# EAGLE board StemsField_V1.0 (EAGLE 8.5.1)
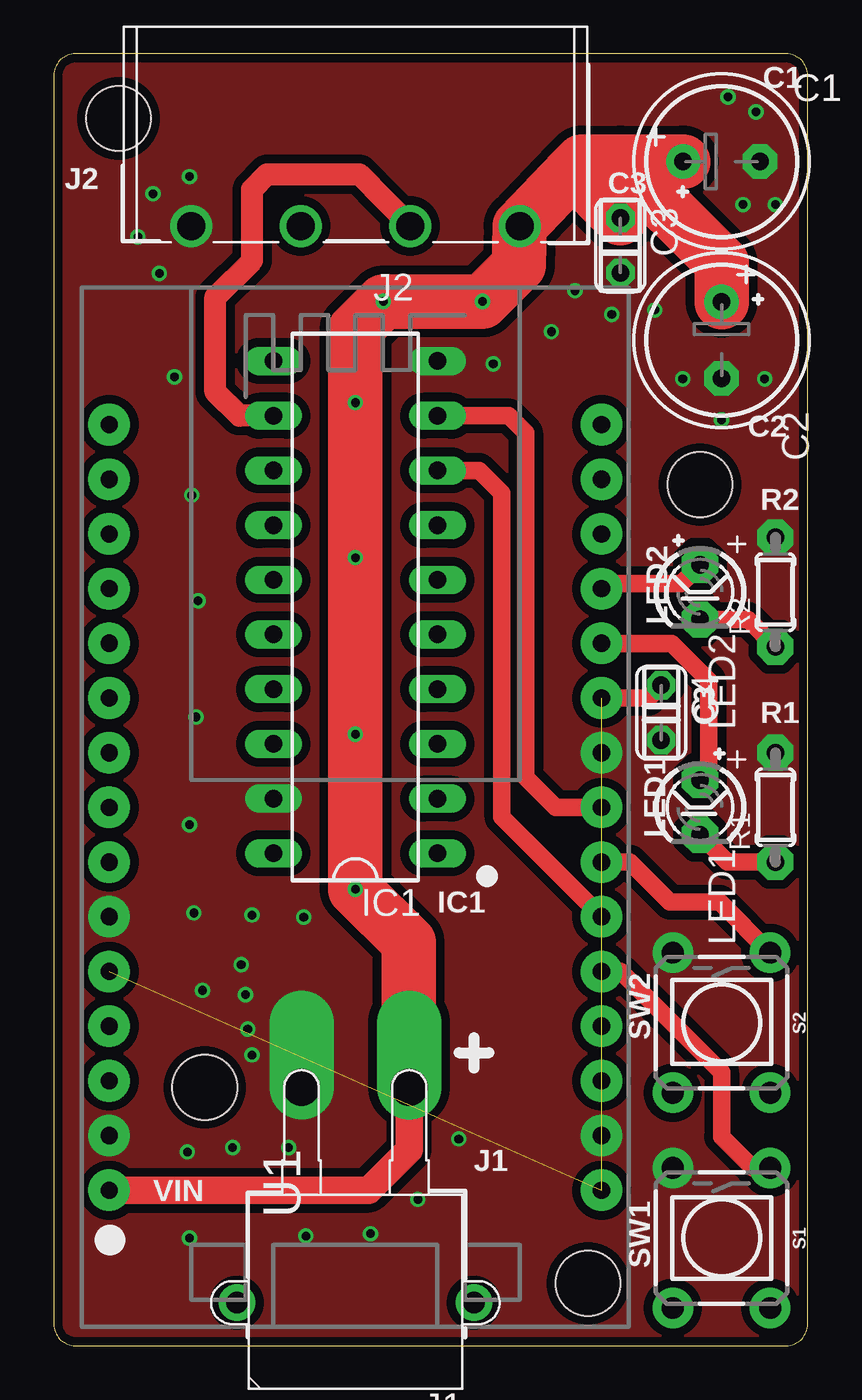
[diagram p0: board, top side]
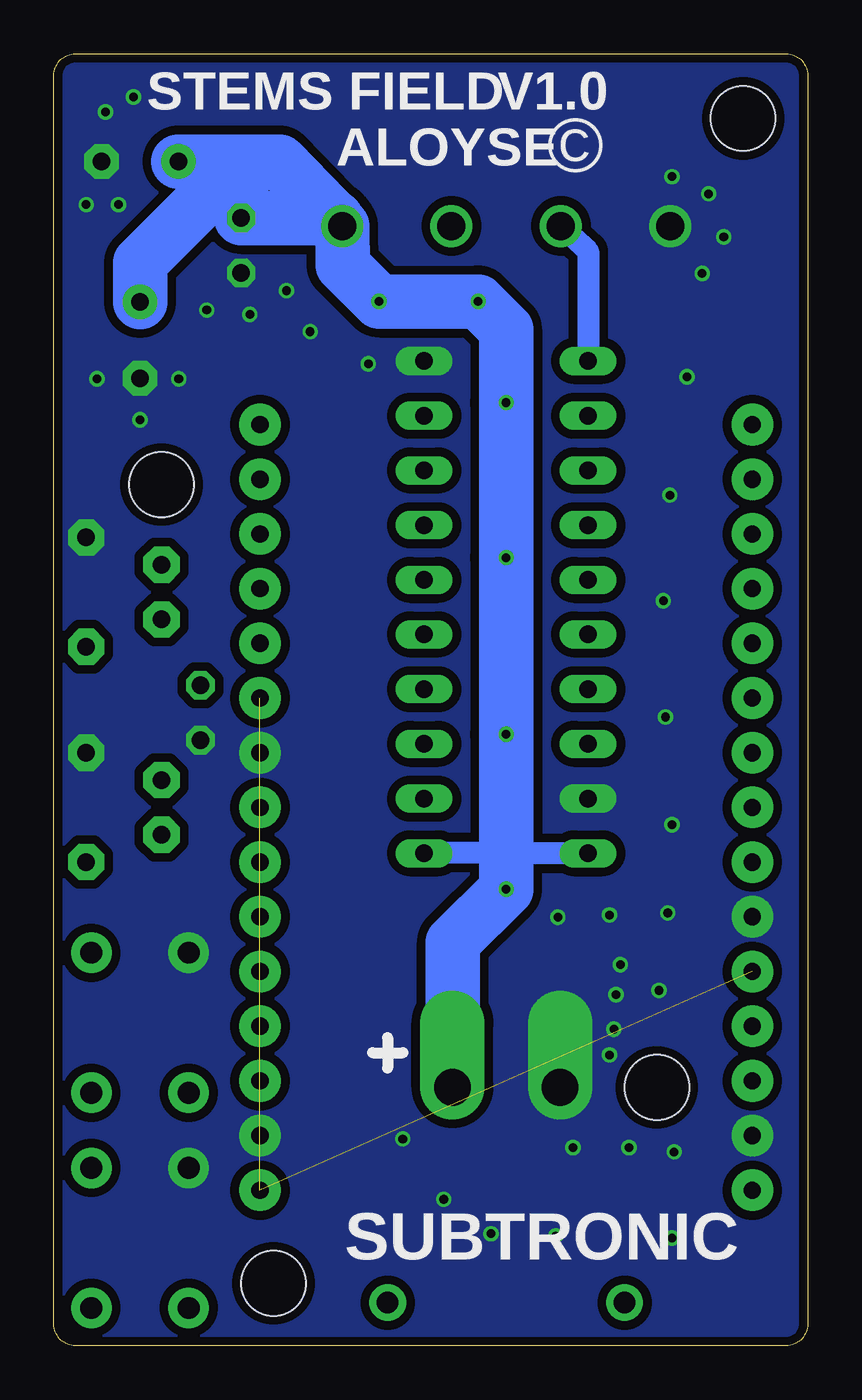
[diagram p1: board, bottom side, seen from below]

Size 35 x 60 mm. Coordinates in mm from the lower left corner, seen from the top.
Outline: 0,59 0,1 arc90 1,0 34,0 arc90 35,1 35,59 arc90 34,60 1,60 arc90 0,59
Copper layers (1*16): Top 0.035mm / dielectric 1.5mm / Bottom 0.035mm
Design rules "SeeedStudio_2layer_DRU_no_angle_20140221": minimum track width 6mil, minimum drill 12mil, track to track 6mil, track to pad 6mil, pad to pad 6mil, via to via 6mil, smd to smd 0mil, copper to edge 10mil, drill to drill 10mil, minimum pad ring 10mil, minimum via ring 6mil, stop-mask expansion 2mil, vias tented up to drill 100mil, thermal gap 10mil
Holes 3 mm at 7,12 24.8,2.9 30,40 3,57

## Footprints (pad centres in the part's own frame; a part is rotated, then mirrored left to right if it is on the bottom)
E3,5-8 = drill 0.813 pad 1.6: + -1.778,0 | drill 0.813 pad 1.6 octagon: - 1.778,0
C025-024X044 = drill 0.813 octagon: 1 -1.27,0; 2 1.27,0
DIL20 = drill 0.813 long: 1 -11.43,-3.81; 2 -8.89,-3.81; 3 -6.35,-3.81; 4 -3.81,-3.81; 5 -1.27,-3.81; 6 1.27,-3.81; 7 3.81,-3.81; 8 6.35,-3.81; 9 8.89,-3.81; 10 11.43,-3.81; 11 11.43,3.81; 12 8.89,3.81; 13 6.35,3.81; 14 3.81,3.81; 15 1.27,3.81; 16 -1.27,3.81; 17 -3.81,3.81; 18 -6.35,3.81; 19 -8.89,3.81; 20 -11.43,3.81
XT30PW-M = drill 1 pad 1.7: NC1 5.5,5; NC2 -5.5,5 | drill 1.7 pad 3 offset: P1 2.5,-5; P2 -2.5,-5
691213500004 = drill 1.3: 1 -7.62,0; 2 -2.54,0; 3 2.54,0; 4 7.62,0
LED3MM = drill 0.813 pad 1.676 octagon: A -1.27,0; K 1.27,0
0204/5 = drill 0.813 pad 1.676 octagon: 1 -2.54,0; 2 2.54,0
TACTILE_SWITCH_PTH_6.0MM = drill 1.016 pad 1.88: 1 -3.251,2.261; 2 3.251,2.261; 3 -3.251,-2.261; 4 3.251,-2.261
ESP12E_DEVKIT = drill 0.8 pad 1.93: 3V3@0 -11.43,-7.62; 3V3@1 11.43,5.08; 3V3@2 11.43,-17.78; AD0 -11.43,17.78; CLK -11.43,-2.54; CMD -11.43,2.54; D0 11.43,17.78; D1 11.43,15.24; D2 11.43,12.7; D3 11.43,10.16; D4 11.43,7.62; D5 11.43,0; D6 11.43,-2.54; D7 11.43,-5.08; D8 11.43,-7.62; EN -11.43,-10.16; GND@0 -11.43,-5.08; GND@1 -11.43,-15.24; GND@2 11.43,2.54; GND@3 11.43,-15.24; RST -11.43,-12.7; RSV@0 -11.43,15.24; RSV@1 -11.43,12.7; RX 11.43,-10.16; SD0 -11.43,0; SD1 -11.43,5.08; SD2 -11.43,7.62; SD3 -11.43,10.16; TX 11.43,-12.7; VIN -11.43,-17.78

## Placement (x,y rotation side)
C1  [E3,5-8]  31,55 0 top
C2  [E3,5-8]  31,46.7 270 top
C3  [C025-024X044]  26.3,51.1 270 top
C4  [C025-024X044]  28.2,29.4 270 top
IC1  74HCT245N  [DIL20]  14,34.3 90 top
J1  XT30PWM  [XT30PW-M]  14,7 180 top
J2  [691213500004]  14,52 180 top
LED1  [LED3MM]  30,25 270 top
LED2  [LED3MM]  30,35 270 top
R1  [0204/5]  33.5,25 90 top
R2  [0204/5]  33.5,35 90 top
S1  MOMENTARY-SWITCH-SPST-PTH-6.0MM  [TACTILE_SWITCH_PTH_6.0MM]  31,5 270 top
S2  MOMENTARY-SWITCH-SPST-PTH-6.0MM  [TACTILE_SWITCH_PTH_6.0MM]  31,15 270 top
U1  ESP12E_DEVKIT  [ESP12E_DEVKIT]  14,25 0 top

## Library data of the parts
C1-C4 = rcl; SPICEPREFIX: C
IC1 = 74xx-eu; SPICEPREFIX: X
J1 = Amass
J2 = Wurth_Elektronik_Electromechanic_Terminal_Blocks_Connectors_rev17a
LED1 LED2 R1 R2 = adafruit
S1 S2 = SparkFun-Switches; PROD_ID: SWCH-08441; SF_SKU: COM-00097
U1 = ESP12E_DEVKIT

## Nets
3.3V: C4.1 U1.3V3@0 U1.3V3@1 U1.3V3@2
5V: C1.+ C2.+ C3.1 IC1.1 IC1.20 J1.P2 J2.1 U1.VIN
APA_DATA-3V: IC1.8 U1.D7
APA_DATA-5V: IC1.11 J2.3
APA_SCK/WS_DATA-3V: IC1.9 U1.D5
APA_SCK/WS_DATA-5V: IC1.12 J2.2
GND: C1.- C2.- C3.2 C4.2 IC1.10 IC1.19 J1.P1 J2.4 R1.2 R2.2 S1.3 S2.3 U1.GND@0 U1.GND@1 U1.GND@2 U1.GND@3
LGREEN: LED2.A U1.D3
LRED: LED1.A U1.D4
N$1: LED1.K R1.1
N$2: LED2.K R2.1
N$3: U1.RST
N$4: U1.EN
N$9: U1.TX
N$10: U1.RX
N$19: U1.D2
N$20: U1.D1
N$21: U1.D0
SW1: S1.1 U1.D8
SW2: S2.1 U1.D6

## Tracks (layer width: path | path; a pad name or v marks a point on that pad's centre or on a via)
3.3V  (2 unrouted)
  Top 0.813: U1.3V3@1 27.61,30.08 C4.1
5V  (via drill 0.4)
  Top 1.27: U1.VIN 14.62,7.22 16.5,9.1 J1.P2
  Top 2.54: J1.P2 16.47,18.73 v14,21.2 v14,28.4 v14,36.6 v14,43.8 14,47.2 v15.3,48.5 v19.9,48.5 21.59,50.19 J2.1 24.06,54.54 | 24.06,54.54 24.52,55 26.3,55 | 26.3,55 C1.+ | 26.3,55 C3.1 24.13,54.54 24.06,54.54 | C2.+ 31,50.3 26.3,55
  Bottom 1.016: IC1.20 14,22.87 14,22.9 17.81,22.9 IC1.1
  Bottom 2.54: J1.P2 16.47,18.73 v14,21.2 14,22.9 v14,28.4 v14,36.6 v14,43.8 14,47.2 v15.3,48.5 v19.9,48.5 21.59,50.19 J2.1 | J2.1 24.52,55 26.3,55 | 26.3,55 C1.+ | C2.+ 31,50.3 26.3,55 | 26.3,55 C3.1 21.89,52.37 J2.1
APA_DATA-3V
  Top 0.813: U1.D7 20.8,24.55 20.8,39.6 19.75,40.65 IC1.8
APA_DATA-5V
  Bottom 1.016: J2.3 10.19,50.83 IC1.11
APA_SCK/WS_DATA-3V
  Top 0.813: IC1.9 21.11,43.19 21.9,42.4 21.9,26.4 23.3,25 U1.D5
APA_SCK/WS_DATA-5V
  Top 1.016: IC1.12 8.61,43.19 7.5,44.3 7.5,48.7 9.2,50.4 9.2,53.7 9.9,54.4 14.18,54.4 J2.2
GND  (via drill 0.4)
  other vias: 6.3,54.3 4.6,53.5 3.9,51.5 4.9,49.8 9.2,20 6.5,20.1 6.3,24.2 6.6,29.2 6.7,34.6 6.4,39.5 5.6,45 9.2,13.5 9,14.7 8.9,16.3 8.7,17.7 6.2,9 8.3,9.2 16.9,6.8 6.3,5 10.9,9.2 14.7,5.2 11.7,5.1 18.8,9.6 11.6,19.9 6.9,16.5 29.2,44.9 33,44.9 31,43 32.6,57.3 31.3,58 32,53 33.5,53 27.9,48.1 25.9,47.9 24.2,49 20.4,45.6 23.1,47.1
  pour Top (isolate 0.406, no thermals): -0.3,60.3 35.3,60.3 35.3,-0.3 -0.3,-0.3
  pour Bottom (isolate 0.406, no thermals): -0.5,60.5 35.1,60.5 35.1,-0.1 -0.5,-0.1
LGREEN
  Top 0.813: U1.D3 25.67,35.4 29.13,35.4 LED2.A
LRED
  Top 0.813: U1.D4 28.68,32.62 30.4,30.9 30.4,26.67 LED1.A
N$1
  Top 0.813: LED1.K 31.27,22.46 R1.1
N$2
  Top 0.813: LED2.K 32.23,33.73 R2.1
SW1
  Top 0.813: U1.D8 26.32,17.38 31,12.7 31,9.7 32.45,8.25 S1.1
SW2
  Top 0.813: U1.D6 26.74,22.46 28.6,20.6 30.91,20.6 S2.1

## Text on the board
_tsilk: C1 | J2 | C3 | C2 | R2 | LED2 | C3 | R1 | LED1 | IC1 | SW2 | J1 | VIN | SW1
_bsilk: V1.0 | STEMS FIELD | ALOYSE | © | SUBTRONIC